# Altium PCB Modified PCB.PcbDoc
Units mm, origin at the board's own origin, x right, y up, seen from the top; angles counter-clockwise.
Board outline 156.8 x 159.97 mm, 2 copper layers (Top Layer, Bottom Layer); 29 components, 22 nets, 99 pads, 0 vias.
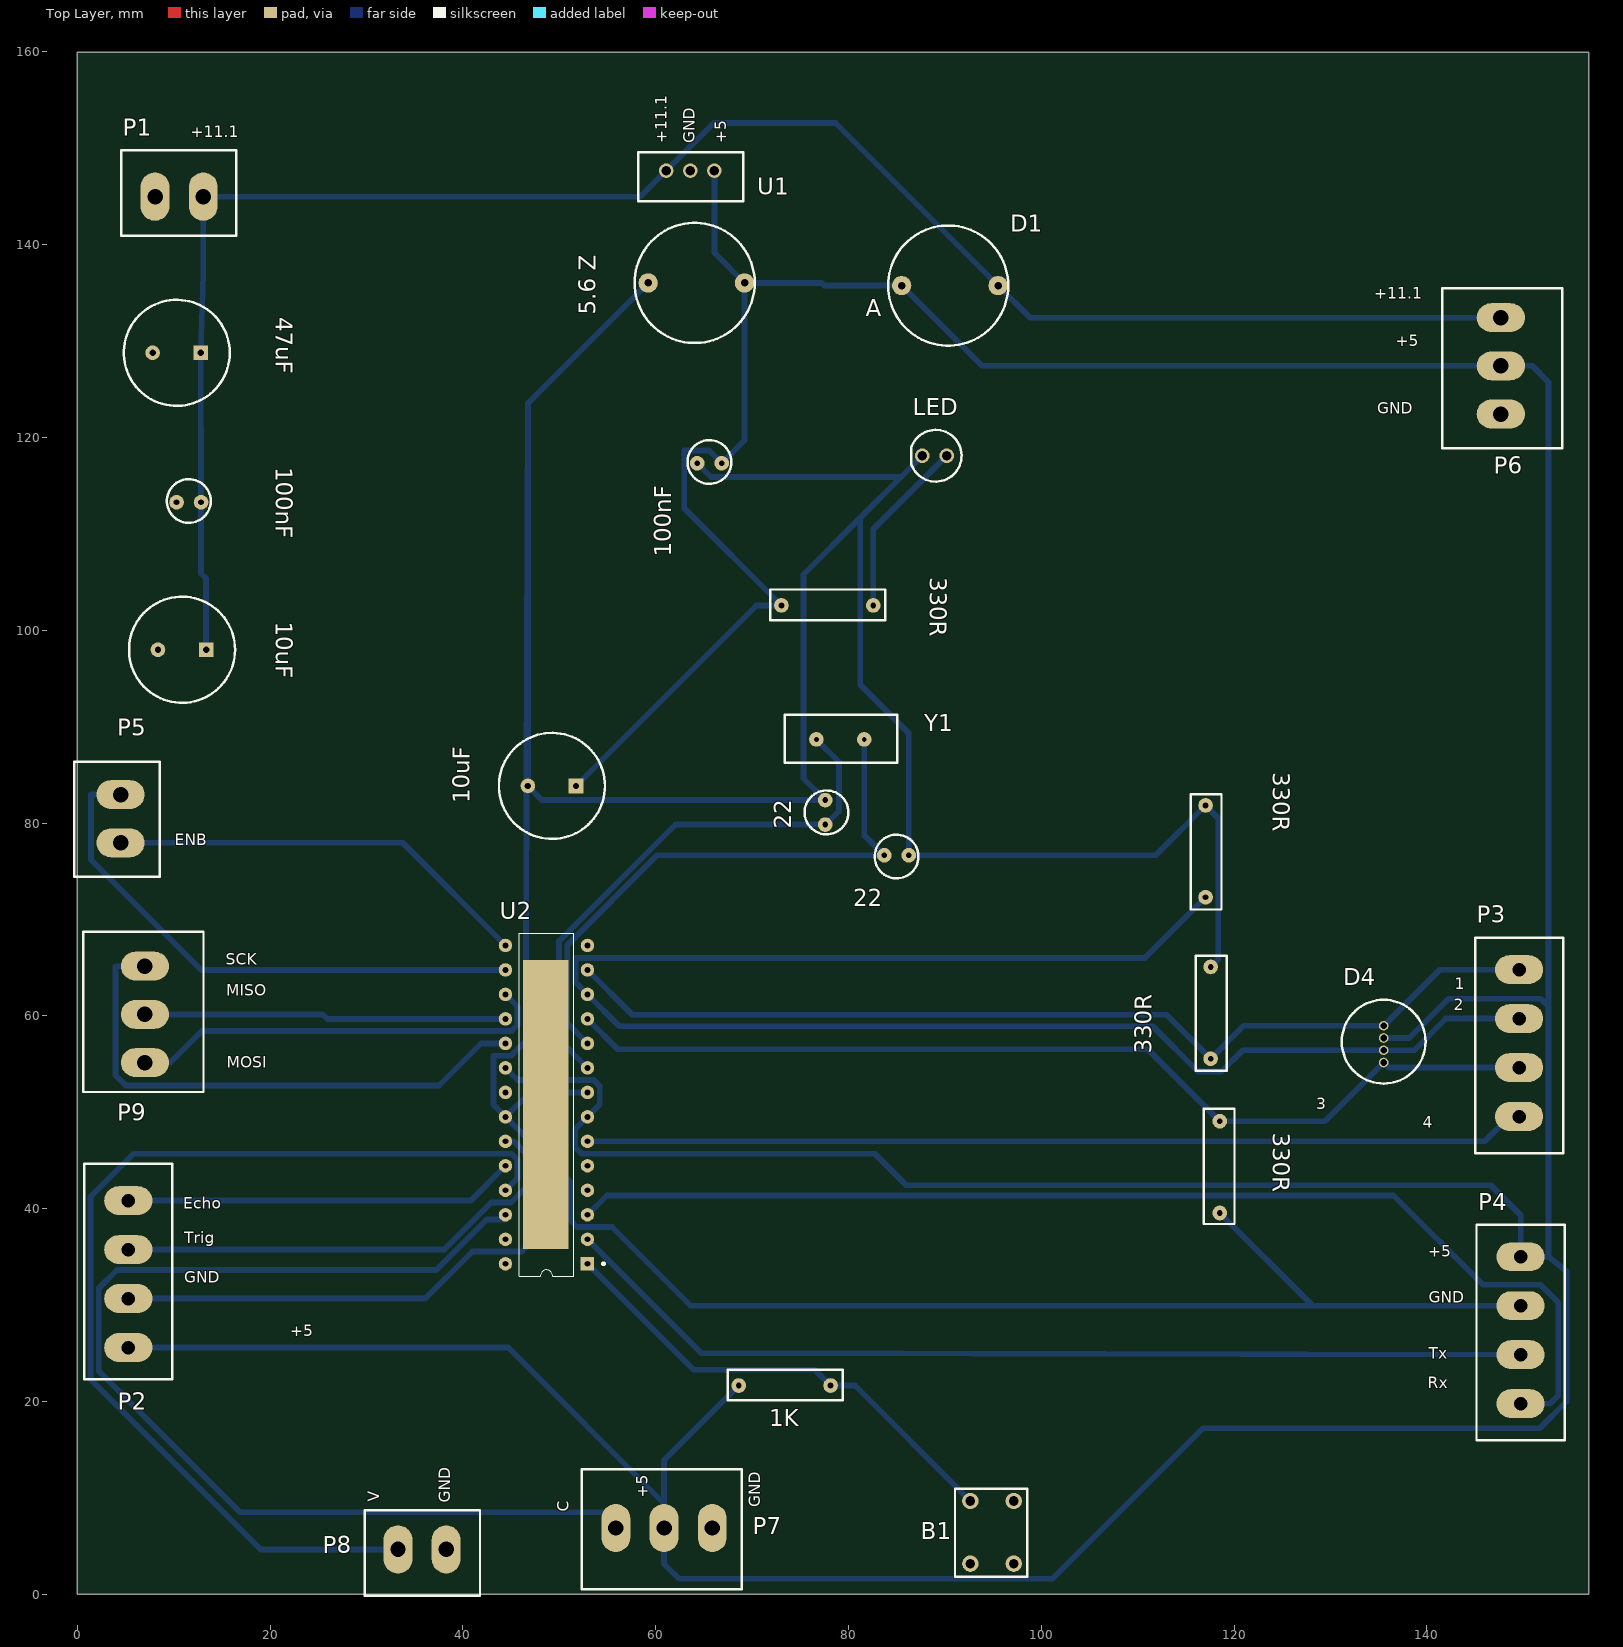
[diagram p0: Top Layer view]
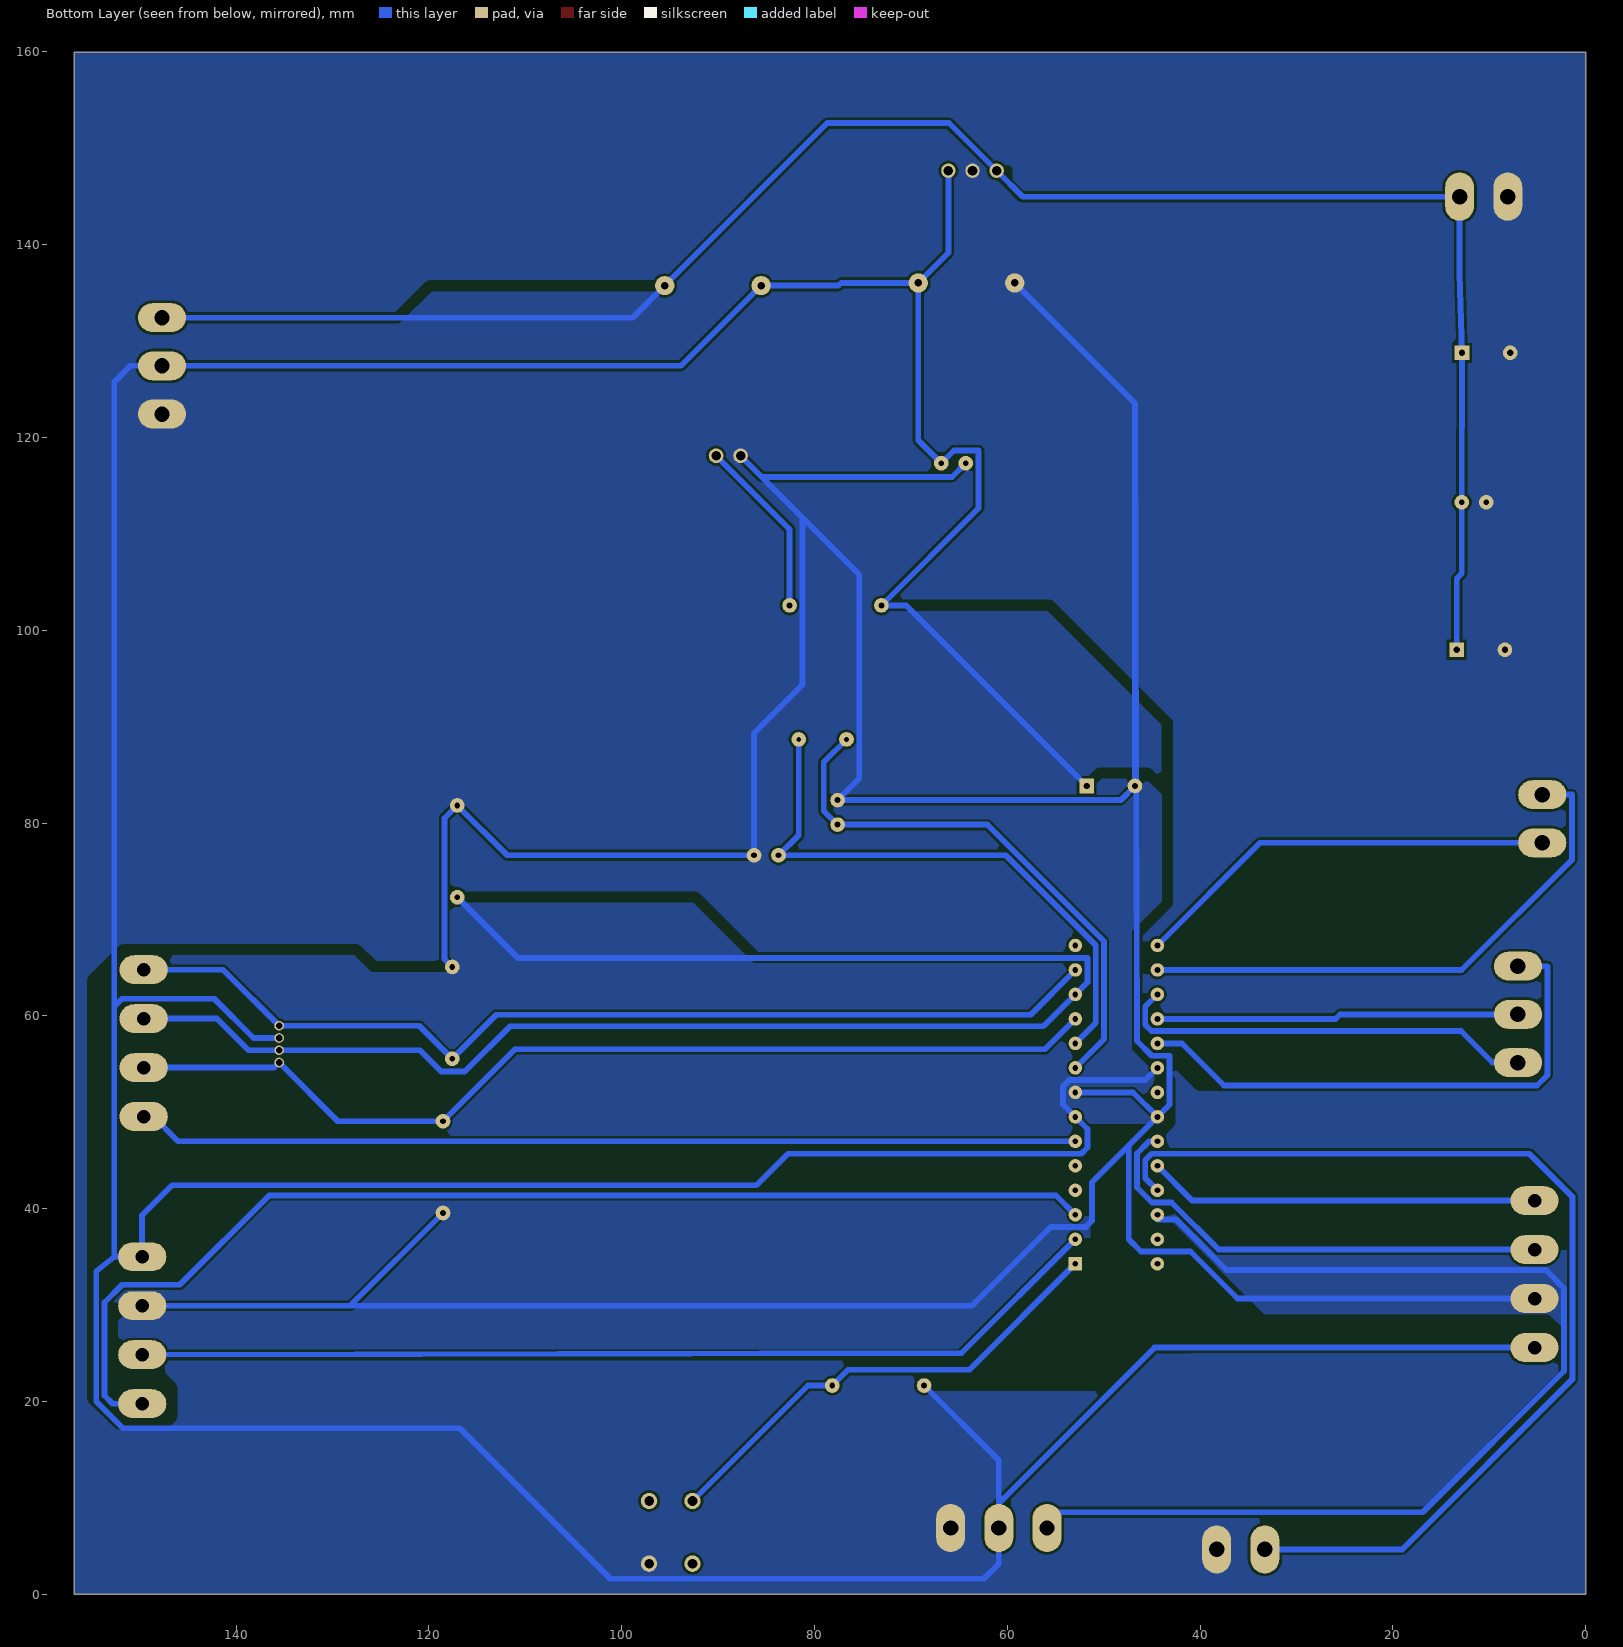
[diagram p1: Bottom Layer view, seen from below]
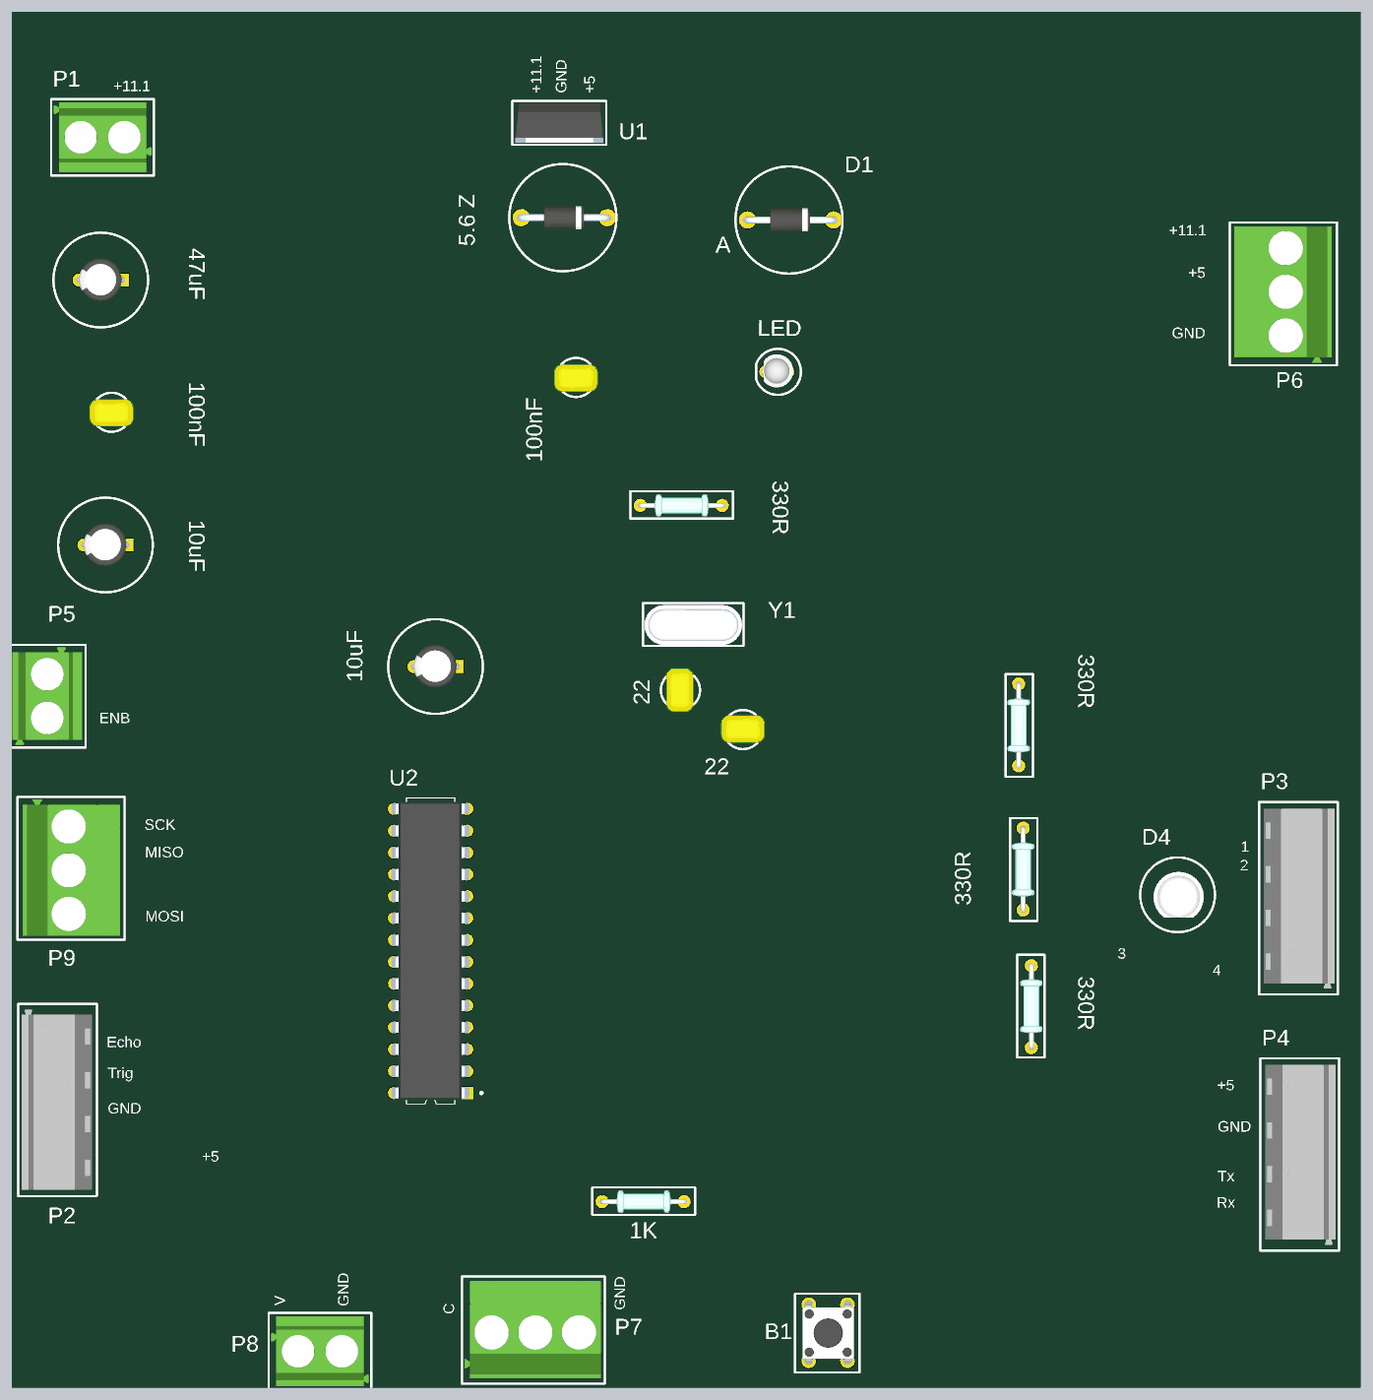
[diagram p2: 3D render of the assembled board from above, using the file's embedded part models]

## Layer stack, top to bottom
Top Solder: solder mask 0.0102, Solder Resist, Dk 3.5
Top Layer: signal copper 0.0356
Dielectric 1: dielectric 0.32, FR-4, Dk 4.8
Bottom Layer: signal copper 0.0356
Bottom Solder: solder mask 0.0102, Solder Resist, Dk 3.5

## Board outline
0,0 156.8,0 156.8,159.975 0,159.975

## Design rules (kind name [scope] priority, off if disabled: settings)
Clearance [All] p1: gap=0.254 ignorepadtopadclearanceinfootprint=TRUE
PolygonConnect [All] p1: connectstyle=Direct reliefconductorwidth=0.254 reliefentries=4 polygonreliefangle="90 Angle" airgapwidth=0.254
RoutingLayers [All] p1: top layer_v5=FALSE bottom layer_v5=TRUE
RoutingVias [All] p1: holewidth=0.711 width=1.27 viastyle="Through Hole" minholewidth=0.711 minwidth=1.27 maxholewidth=0.711 maxwidth=1.27
SolderMaskExpansion [All] p1: expansion=0.102 istentingtop=FALSE
SupplyNets "Schematic Supply Nets_1" [InNet('GND')] p1: voltage=0.000
SupplyNets "Schematic Supply Nets" [InNet('+11.1')] p2: voltage=0.000
Width [All] p1: maxlimit=0.6 minlimit=0.6 preferedwidth=0.6
29 further rules are at their usual default settings.

## Classes and differential pairs
component class Sheet3: 1K "5.6 Z" 10uF 22 47uF 100nF 330R B1 D1 D4 led P1 P2 P3 P4 P5 P6 P7 P8 P9 U1 U2 Y1

## Components (designator, comment, footprint, x,y, rotation, side; value= is the part's Value field where it differs from the comment)
1K "1k" RES 76.625,21.65 r180 top (schematic designator R2)
"5.6 Z" "Zener 5.6" 1N4007 59.225,136.025 r0 top (schematic designator D2)
10uF "10uF" CAP 51.75,83.85 r180 top (schematic designator C3)
10uF "10uF" CAP 13.375,97.975 r180 top (schematic designator C2)
22 "22pF" "CAP 22pF" 77.6,79.835 r90 top (schematic designator C7)
22 "22pF" "CAP 22pF" 83.725,76.65 r0 top (schematic designator C6)
47uF "47uF" CAP 12.825,128.775 r180 top (schematic designator C5)
100nF "CAP 100nF" "CAP 100nF" 66.85,117.325 r180 top (schematic designator C4)
100nF "100nF" "CAP 100nF" 12.85,113.275 r180 top (schematic designator C1)
330R "330R" RES 117.575,57.075 r90 top (schematic designator R5)
330R "330R" RES 117.05,73.825 r90 top (schematic designator R4)
330R "330R" RES 118.525,47.55 r270 top (schematic designator R3)
330R "330R" RES 81.05,102.575 r180 top (schematic designator R1)
B1 "Push Button" "Push Button" 97.15,9.675 r180 top
D1 "1N4007" 1N4007 85.525,135.75 r0 top
D4 "RGB LED" "RGB LED" 135.525,55.16 r90 top
LED "LED" LED 90.2,118.1 r180 top (schematic designator D3)
P1 "Terminal 2 Pin" "Terminal 2 Pin" 13.075,144.975 r180 top
P2 "Terminal Block 4 Pin" "Terminal Block 4 Pin" 5.3,25.59 r90 top
P3 "Terminal Block 4 Pin" "Terminal Block 4 Pin" 149.575,64.79 r270 top
P4 "Terminal Block 4 Pin" "Terminal Block 4 Pin" 149.725,35.01 r270 top
P5 "Terminal 2 Pin" "Terminal 2 Pin" 4.5,82.95 r270 top
P6 "Terminal 3 Pin" "Terminal 3 Pin" 147.675,122.425 r90 top
P7 "Terminal 3 Pin" "Terminal 3 Pin" 55.875,6.875 r0 top
P8 "Terminal 2 Pin" "Terminal 2 Pin" 33.275,4.65 r0 top
P9 "Terminal 3 Pin" "Terminal 3 Pin" 7.025,65.15 r270 top
U1 "7805 Regulator" "7805 Reg" 61.1,147.675 r0 top
U2 "ATmega8" ATmega8A-PU 52.934,34.28 r180 top
Y1 "crystal" crystal 76.675,88.675 r0 top

## Footprints (in the part's own frame and the unit in brackets; to place one, negate y for a bottom-side part, rotate by r counter-clockwise, add the part's x,y. Pads: shape width x height; smd on the part's side, far side on the other; paste and mask are expansions set on the pad)
1N4007 [mm]
  round 2 hole 0.78: 1(0,0) 2(10,0)
  silkscreen extent -1.4,-6.22 11.05,6.22, body extent -0.52,-1.35 10.43,1.35, height 2.68
"7805 Reg" [mm]
  round 1.5 hole 1: 1(0,0) 2(2.5,0) 3(5,0)
  silkscreen extent -2.92,-3.18 8,1.9, body extent -2.56,-2.92 7.64,1.58, height 22.68
ATmega8A-PU [mm]
  rect 1.4x1.4 hole 0.6: 1(0,0)
  round 1.4 hole 0.6: 2(0,-2.54) 3(0,-5.08) 4(0,-7.62) 5(0,-10.16) 6(0,-12.7) 7(0,-15.24) 8(0,-17.78) 9(0,-20.32) 10(0,-22.86) 11(0,-25.4) 12(0,-27.94) 13(0,-30.48) 14(0,-33.02) 15(8.509,-33.02) 16(8.509,-30.48) 17(8.509,-27.94) 18(8.509,-25.4) 19(8.509,-22.86) 20(8.509,-20.32) 21(8.509,-17.78) 22(8.509,-15.24) 23(8.509,-12.7) 24(8.509,-10.16) 25(8.509,-7.62) 26(8.509,-5.08) 27(8.509,-2.54) 28(8.509,0)
  rect 4.7x30 smd: 29(4.318,-16.51)
  silkscreen extent -1.78,-34.29 7.07,1.27, body extent -0.76,-33.85 9.4,0.83, height 4.57
CAP [mil]
  rect 60x60 hole 25.59: 1(0,0)
  round 60 hole 25.59: 2(196.85,0)
  silkscreen extent -118,-216 315,216, body extent -8,-100 208,97, height 492
"CAP 22pF" [mil]
  round 60 hole 23.62: 1(0,0) 2(100,0)
  silkscreen extent -39,-94 139,84, body extent -50,-65 150,60, height 250
"CAP 100nF" [mil]
  round 60 hole 23.62: 1(0,0) 2(100,0)
  silkscreen extent -39,-94 139,84, body extent -50,-65 150,60, height 250
crystal [mil]
  round 60 hole 19.68: 1(0,0) 2(195.28,0)
  silkscreen extent -130,-95 330,100, body extent -123,-92 323,92, height 138
LED [mil]
  round 60 hole 39.37: 1(0,0) 2(100,0)
  silkscreen extent -60,-105 146,105, body extent -25,-80 115,71, height 209
"Push Button" [mm]
  round 1.7 hole 1: 1(0,0) 2(4.5,0) 3(0,6.5) 4(4.5,6.5)
  silkscreen extent -1.4,-1.27 6.1,7.87, body extent -0.76,-0.54 5.25,7.15, height 4.95
RES [mil]
  round 60 hole 23.62: 1(-60,0) 2(314.96,0)
  silkscreen extent -110,-65 360,60, body extent -74,-51 324,51, height 102
"RGB LED" [mm]
  round 1 hole 0.7: 1(0,0) 2(1.27,0) 3(2.54,0) 4(3.81,0)
  silkscreen extent -2.19,-4.34 6.5,4.34, body extent -0.5,-3.05 4.81,2.8, height 11.65
"Terminal 2 Pin" [mm]
  oval 3x5 hole 1.6: 1(0,0) 2(5,0)
  silkscreen extent -3.43,-4.83 8.51,4.06, body extent -3.14,-4.45 8.22,3.65, height 10
"Terminal 3 Pin" [mm]
  oval 3x5 hole 1.6: 1(0,0) 2(5,0) 3(10,0)
  silkscreen extent -3.55,-6.37 13.05,6.08, body extent -3.24,-5.78 12.59,5.58, height 18
"Terminal Block 4 Pin" [mm]
  oval 3x5 hole 1.4: 1(0,0) 2(5.08,0) 3(10.16,0) 4(15.24,0)
  silkscreen extent -3.3,-4.57 19.05,4.57, body extent -2.54,-4.01 18.38,4.19, height 11.25

## Part data
1K 330R 330R 330R 330R: library part RES
"5.6 Z": library part Zener
10uF 10uF 47uF: library part CAP
22 22: library part "CAP 22pF"
100nF: library part "CAP 100nF"

## Nets (pads, with @x,y where several pads share a name; then routed paths per layer and width w, separated by ;. In a path a pad name is that pad's centre, name@x,y a point inside that pad or via, vN(x,y) a via of type N, cw(c..) or ccw(c..) an arc to the next point about the centre after c; other vN are vias at no path point)
+5v: 1K.2 10uF.1@51.75,83.85 100nF.1@66.85,117.325 330R.2@73.05,102.575 "5.6 Z.2" D1.1 D4.3 P2.1 P4.1 P6.2 P7.2 U1.3 U2.7 U2.20 | length 613.6
  Bottom Layer w0.6: P2.1 44.708,25.59 60.875,9.423 ; U2.20 45.685,53.34 53.574,53.34 54.209,52.705 54.209,50.795 U2.7 ; 10uF.1@51.75,83.85 70.475,102.575 73.05,102.575 62.972,112.653 62.972,118.643 65.532,118.643 66.85,117.325 69.225,119.7 69.225,136.025 ; U1.3 66.1,139.15 69.225,136.025 ; 1K.2 60.875,13.9 60.875,9.423 ; D4.3 138.182,57.7 142.255,61.773 151.822,61.773 152.634,60.96 ; P4.1 P4.1@149.739,35.01 ; 51.669,48.255 51.669,48.26 U2.7 ; 51.669,48.255 51.669,46.355 52.33,45.695 82.734,45.695 86.01,42.418 146.64,42.418 149.739,39.319 P4.1@149.739,35.01 ; 51.669,48.255 U2.7 ; 60.875,9.423 P7.2 60.875,3.15 62.424,1.6 101.174,1.6 116.795,17.221 151.72,17.221 154.489,19.99 154.489,33.511 152.634,35.01 ; 69.225,136.025 77.222,136.025 77.497,135.75 D1.1 93.85,127.425 P6.2 150.939,127.425 152.634,125.73 152.634,60.96 ; P4.1@149.739,35.01 152.634,35.01 ; 152.634,35.01 152.634,60.96
+11.1: 10uF.1@13.375,97.975 47uF.1 100nF.1@12.85,113.275 D1.2 P1.1 P6.3 U1.1 | length 193.4
  Bottom Layer w0.6: P1.1 P1.1@13.075,144.958 ; 10uF.1@13.375,97.975 13.375,105.359 12.85,105.884 12.85,113.275 12.85,121.006 12.825,121.031 47uF.1 13.075,136.978 P1.1@13.075,144.958 ; P6.3 98.85,132.425 D1.2 78.672,152.603 66.028,152.603 U1.1 58.383,144.958 P1.1@13.075,144.958
Current: P7.1 U2.26 | length 115.5
  Bottom Layer w0.6: U2.26 44.425,38.887 42.5,38.887 37.242,33.63 4.121,33.63 2.241,31.75 2.241,23.165 16.897,8.509 55.875,8.509 P7.1
Echo: P2.4 U2.24 | length 40.6
  Bottom Layer w0.6: P2.4 40.815,40.83 U2.24
ENA: P5.1 U2.16 | length 57.6
  Bottom Layer w0.6: P5.1 1.428,82.95 1.428,76.2 12.868,64.76 U2.16
ENB: P5.2 U2.15 | length 44.3
  Bottom Layer w0.6: P5.2 33.775,77.95 U2.15
GND: 10uF.2 22.2 47uF.2 100nF.2 330R.2@117.05,81.825 330R.2@117.575,65.075 330R.2@118.525,39.55 "5.6 Z.1" B1.3 LED.2 P1.2 P2.2 P4.2 P6.1 P7.3 P8.2 U1.2 U2.8 U2.22 | length 510.3
  Bottom Layer w0.6: P2.2 36.111,30.67 41.001,35.56 46.132,35.56 47.402,36.83 47.402,46.543 ; U2.8 46.965,52.06 U2.22 ; 59.225,136.025 46.75,123.55 ; 100nF.2@64.31,117.325 65.735,115.9 85.46,115.9 ; LED.2 85.46,115.9 ; 330R.2@117.575,65.075 118.37,65.87 118.37,80.505 117.05,81.825 111.875,76.65 86.265,76.65 86.265,89.306 81.235,94.336 81.235,111.675 ; 330R.2@118.525,39.55 128.165,29.93 ; P4.2 128.165,29.93 ; U2.22 47.402,46.543 ; U2.22 43.171,50.774 43.171,55.855 45.009,55.855 46.533,57.379 46.62,83.85 46.75,123.55 ; 46.75,123.55 46.75,83.85 48.225,82.375 77.6,82.375 75.342,84.633 75.342,105.782 81.235,111.675 ; 47.402,46.543 51.212,42.733 51.212,38.735 51.847,38.1 55.479,38.1 63.633,29.947 128.165,29.93 ; 81.235,111.675 85.46,115.9
IN1: 330R.1@117.575,55.551 D4.4 P3.1 U2.13 | length 104.3
  Bottom Layer w0.6: U2.13 57.572,60.122 113.004,60.122 117.575,55.551 120.994,58.97 D4.4 141.345,64.79 P3.1
IN2: 330R.1@117.05,72.301 D4.2 P3.2 U2.12 | length 174.5
  Bottom Layer w0.6: 330R.1@117.05,72.301 110.763,66.014 51.68,66.014 51.68,63.474 U2.12 56.226,58.928 111.563,58.928 116.262,54.229 118.7,54.229 120.901,56.43 D4.2 138.715,56.43 141.995,59.71 P3.2
IN3: 330R.1@118.525,49.074 D4.1 P3.3 U2.11 | length 103.8
  Bottom Layer w0.6: U2.11 56.074,56.54 111.059,56.54 118.525,49.074 129.439,49.074 D4.1 136.055,54.63 P3.3
IN4: P3.4 U2.6 | length 97.7
  Bottom Layer w0.6: U2.6 52.944,46.99 146.01,46.99 148.57,49.55 P3.4
MISO: P9.2 U2.18 | length 37.6
  Bottom Layer w0.6: P9.2 25.482,60.15 25.952,59.68 U2.18
MOSI: P9.3 U2.17 | length 44
  Bottom Layer w0.6: P9.3 9.658,55.15 12.928,58.42 45.044,58.42 45.679,59.055 45.679,60.966 U2.17
NetB1_2: 1K.1 B1.2 U2.1 | length 49.9
  Bottom Layer w0.6: U2.1 63.922,23.292 76.507,23.292 1K.1 80.675,21.65 B1.2
NetC6_1: 22.1@83.725,76.65 U2.10 Y1.2 | length 60.7
  Bottom Layer w0.6: U2.10 50.826,59.248 50.826,67.33 60.146,76.65 83.725,76.65 81.635,78.74 Y1.2
NetC7_1: 22.1@77.6,79.835 U2.9 Y1.1 | length 57.4
  Bottom Layer w0.6: U2.9 49.972,57.562 49.972,67.746 62.061,79.835 77.6,79.835 79.025,81.26 79.025,86.325 Y1.1
NetD3_1: 330R.1@82.574,102.575 LED.1 | length 18.7
  Bottom Layer w0.6: 330R.1@82.574,102.575 82.574,110.474 LED.1
Rx: P4.4 U2.3 | length 120
  Bottom Layer w0.6: U2.3 54.951,41.377 136.556,41.377 145.827,32.106 151.796,32.106 153.633,30.269 153.633,20.616 152.787,19.77 P4.4
SCK: P9.1 U2.19 | length 57.1
  Bottom Layer w0.6: P9.1 3.968,65.15 3.968,53.848 5.035,52.781 37.518,52.781 41.877,57.14 U2.19
Trig: P2.3 U2.23 | length 50.1
  Bottom Layer w0.6: P2.3 38.067,35.75 42.957,40.64 44.989,40.64 46.533,42.184 46.533,45.72 45.273,46.98 U2.23
Tx: P4.3 U2.2 | length 101.7
  Bottom Layer w0.6: U2.2 64.74,25.014 148.714,24.841 P4.3
Voltage: P8.1 U2.25 | length 108.2
  Bottom Layer w0.6: P8.1 33.275,4.648 19.03,4.648 1.377,22.301 1.377,41.224 5.848,45.695 45.04,45.695 45.679,45.056 45.679,43.154 U2.25
pads on no net: B1.1 B1.4 U2.4 U2.5 U2.14 U2.21 U2.27 U2.28 U2.29

## Polygon pours and split planes (outlines as drawn)
GND on Bottom Layer "GND_L02_P000" (solid, remove dead copper, pour order 0): 0,0 156.8,0 156.8,159.975 0,159.975

## Silkscreen, mask and mechanical layers (free items; w line width, h text height)
Top Overlay:
  text "+11.1" at 11.775,150.725 h2
  text "+11.1" at 61.55,150.5 h2 r90
  text "GND" at 64.453,150.5 h2 r90
  text "+5" at 67.753,150.5 h2 r90
  text "+11.1" at 134.533,133.95 h2
  text "A" at 81.8,131.975 h3
  text "+5" at 136.766,129.022 h2
  text "GND" at 134.85,122.022 h2
  text "ENB" at 10.125,77.275 h2
  text "SCK" at 15.4,64.872 h2
  text "1" at 142.875,62.325 h2
  text "MISO" at 15.475,61.672 h2
  text "2" at 142.773,60.15 h2
  text "MOSI" at 15.5,54.222 h2
  text "3" at 128.55,49.897 h2
  text "4" at 139.6,47.975 h2
  text "Echo" at 11.025,39.595 h2
  text "Trig" at 11.125,36.001 h2
  text "+5" at 140.125,34.597 h2
  text "GND" at 11.125,31.897 h2
  text "GND" at 140.175,29.797 h2
  text "+5" at 22.075,26.322 h2
  text "Tx" at 140.175,24.025 h2
  text "Rx" at 140.075,20.95 h2
  text "+5" at 59.603,10.025 h2 r90
  text "V" at 31.75,9.577 h2 r90
  text "GND" at 39.128,9.475 h2 r90
  text "GND" at 71.278,9.05 h2 r90
  text "C" at 51.403,8.575 h2 r90